# Altium PCB PCB1.PcbDoc
Units mm, origin at the board's own origin, x right, y up, seen from the top; angles counter-clockwise.
Board outline 27.94 x 25.4 mm, 2 copper layers (Top Layer, Bottom Layer); 2 components, 24 nets, 34 pads, 4 vias.
Unrouted connection lines stored in the file: 4.
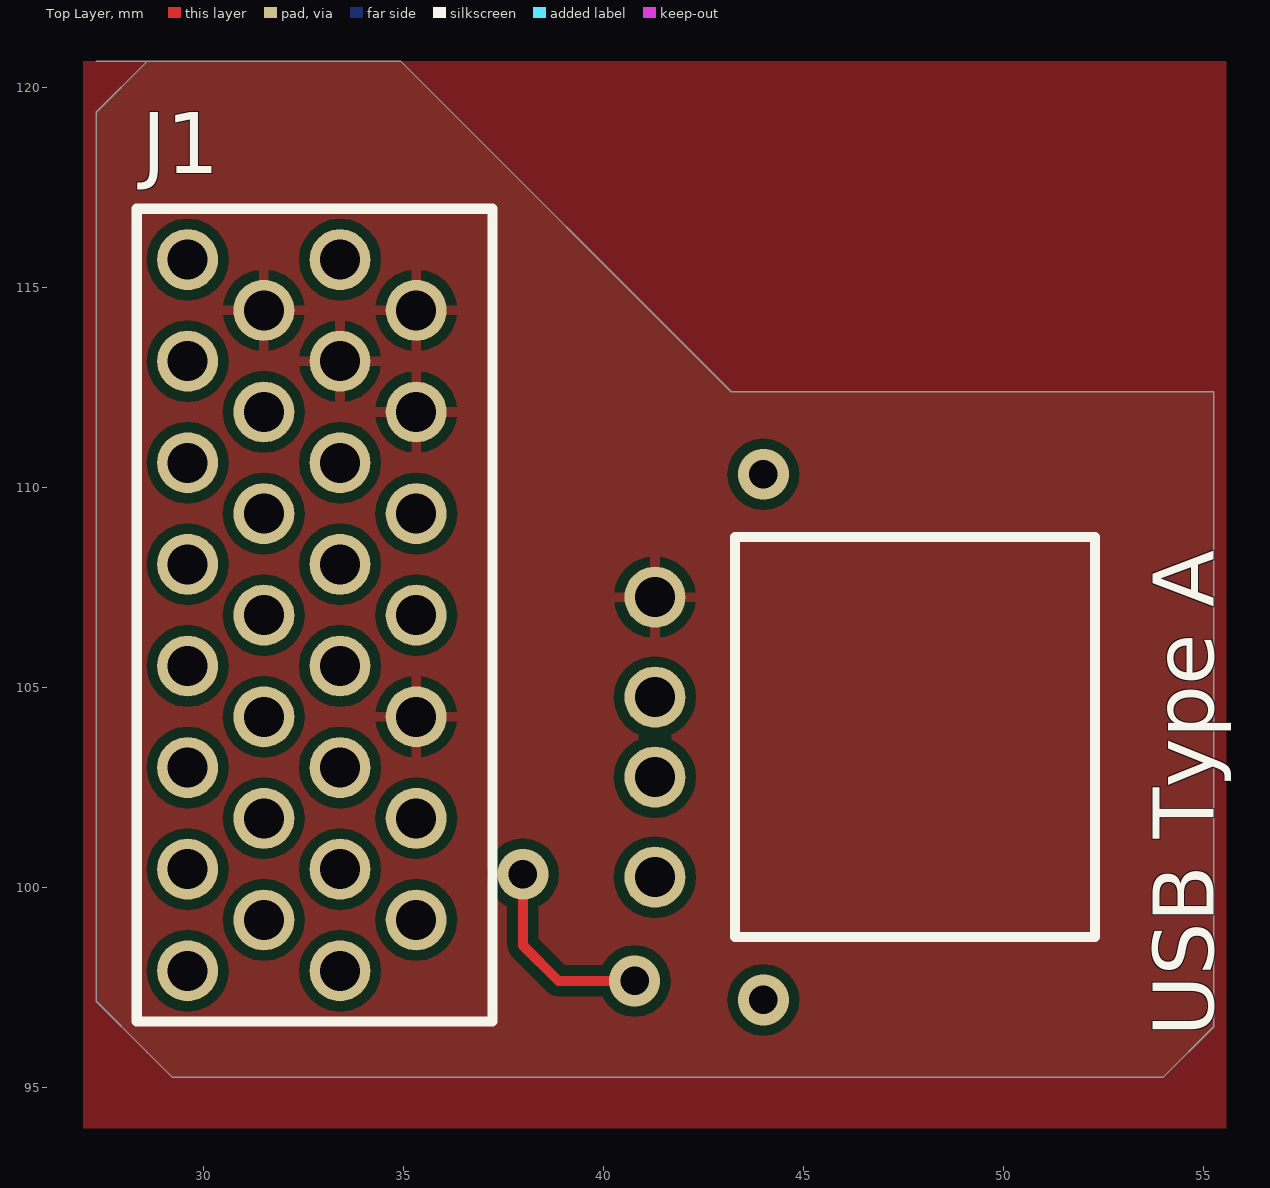
[diagram p0: Top Layer view]
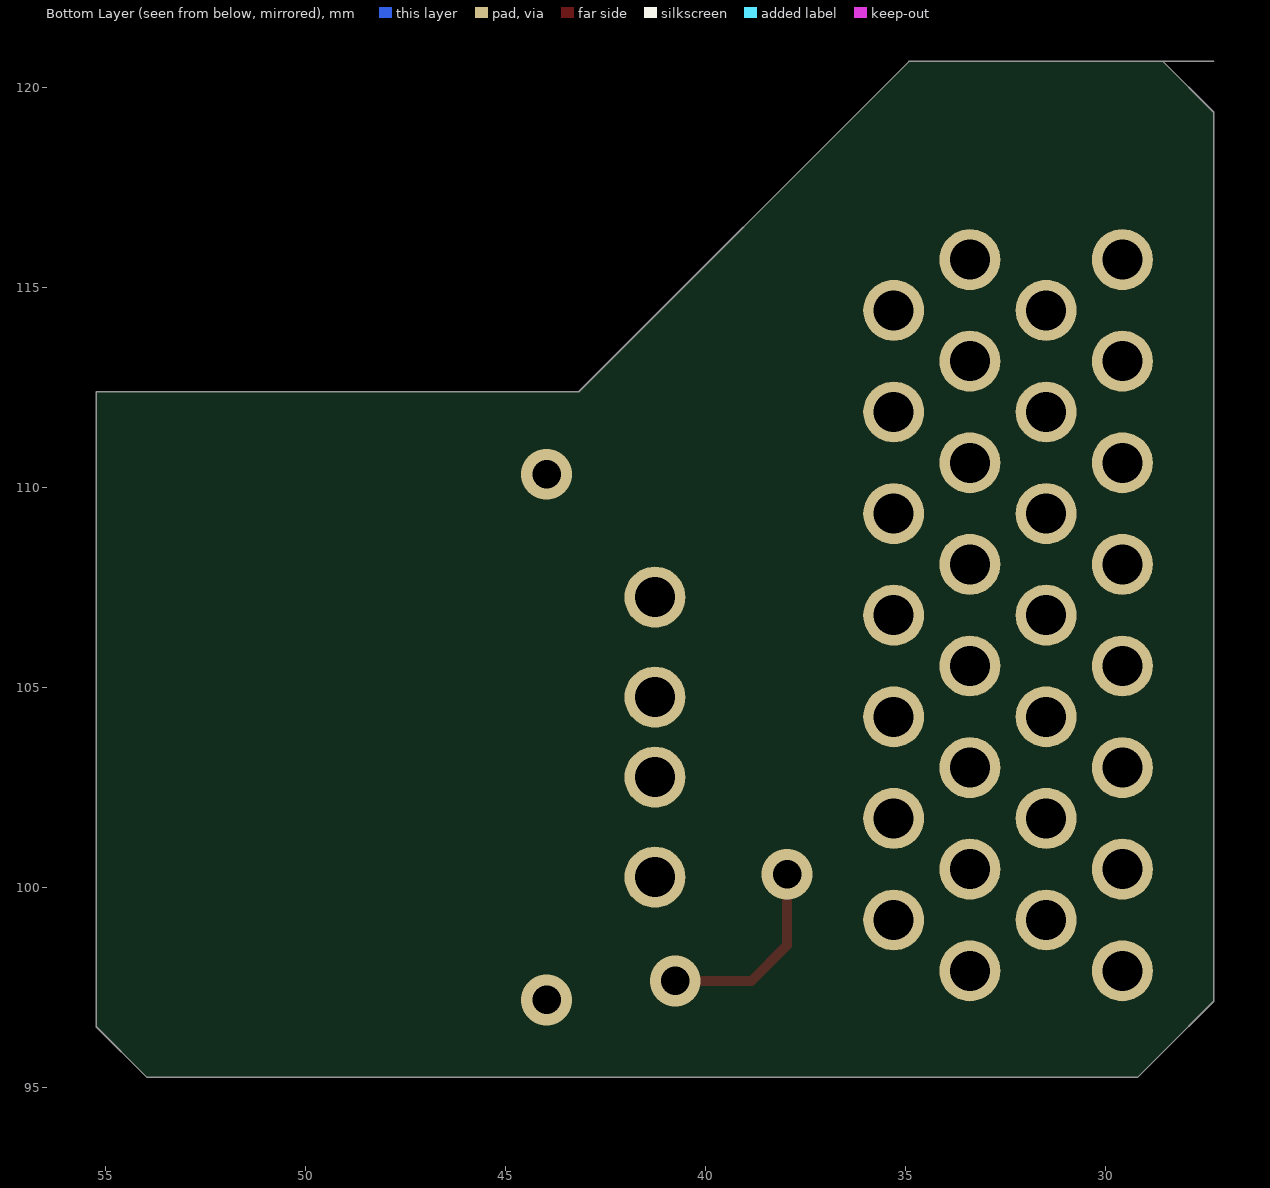
[diagram p1: Bottom Layer view, seen from below]

## Layer stack, top to bottom
Top Solder: solder mask 0.0102, Solder Resist, Dk 3.5
Top Layer: signal copper 0.0356
Dielectric 1: dielectric 0.32, FR-4, Dk 4.8
Bottom Layer: signal copper 0.0356
Bottom Solder: solder mask 0.0102, Solder Resist, Dk 3.5

## Board outline
29.21,120.65 28.575,120.65 27.305,119.38 27.305,97.155 28.575,95.885 29.21,95.25 53.975,95.25 55.245,96.52 55.245,112.395 43.18,112.395 34.925,120.65 27.305,120.65

## Design rules (kind name [scope] priority, off if disabled: settings)
Clearance [All] p1: gap=0.254
PolygonConnect [All] p1: connectstyle=Relief reliefconductorwidth=0.254 reliefentries=4 polygonreliefangle="90 Angle" airgapwidth=0.254
RoutingVias [All] p1: holewidth=0.711 width=1.27 viastyle="Through Hole" minholewidth=0.711 minwidth=1.27 maxholewidth=0.711 maxwidth=1.27
SolderMaskExpansion [All] p1: expansion=0.102
Width [All] p1: maxlimit=0.254 minlimit=0.254 preferedwidth=0.254
30 further rules are at their usual default settings.

## Components (designator, comment, footprint, x,y, rotation, side; value= is the part's Value field where it differs from the comment)
J1 "JAE_TX24" TX_24 29.591,97.917 r0 top
"USB Type A" "USB" "USB 2.0 Type A Female" 41.275,103.759 r90 top

## Footprints (in the part's own frame and the unit in brackets; to place one, negate y for a bottom-side part, rotate by r counter-clockwise, add the part's x,y. Pads: shape width x height; smd on the part's side, far side on the other; paste and mask are expansions set on the pad)
TX_24 [mil]
  round 60 hole 39.37: 1(0,0) 2(75,50) 3(0,100) 4(75,150) 5(0,200) 6(75,250) 7(0,300) 8(75,350) 9(0,400) 10(75,450) 11(0,500) 12(75,550) 13(0,600) 14(75,650) 15(0,700) 16(150,0) 17(225,50) 18(150,100) 19(225,150) 20(150,200) 21(225,250) 22(150,300) 23(225,350) 24(150,400) 25(225,450) 26(150,500) 27(225,550) 28(150,600) 29(225,650) 30(150,700)
  silkscreen extent -50,-50 300,750
"USB 2.0 Type A Female" [mm]
  round 1.524 hole 1: 1(-3.5,0) 2(-1,0) 3(1,0) 4(3.5,0)
  silkscreen extent -5,-11 5,-2

## Part data
"USB Type A": library part Component_1

## Via types
v1: diameter 1.27, hole 0.711, Top Layer to Bottom Layer, 4 vias

## Nets (pads, with @x,y where several pads share a name; then routed paths per layer and width w, separated by ;. In a path a pad name is that pad's centre, name@x,y a point inside that pad or via, vN(x,y) a via of type N, cw(c..) or ccw(c..) an arc to the next point about the centre after c; other vN are vias at no path point)
+5V: J1.19
+5V_USB: "USB Type A.1" J1.17 | length 5.4
  Top Layer w0.254: v1(37.973,100.33) 37.973,98.552 38.862,97.663 v1(40.767,97.663)
  Bottom Layer w0.254: v1@37.973,99.822 v1(37.973,100.33)
"BUS ID": J1.23
CANH1: J1.12
CANL1: J1.13
D_N: "USB Type A.2" J1.1 | length 0
  Bottom Layer w0.254: 41.275,102.743 41.275,102.759
D_P: "USB Type A.3" J1.2
FMU-SWCLK: J1.18
FMU-SWDIO: J1.3
GND: "USB Type A.4" J1.14 J1.21 J1.27 J1.28 J1.29
IO-PWM6: J1.8
IO-PWM7: J1.5
IO-PWM8: J1.6
IO-SWCLK: J1.20
IO-SWDIO: J1.4
"IO-USART1 RX": J1.22
"IO-USART1 TX": J1.7
SER2CT: J1.25
SER2RT: J1.10
SER2RX: J1.11
SER2TX: J1.26
SER5RX: J1.9
SER5TX: J1.24
UGND: J1.16
pads on no net: J1.15 J1.30
copper on no net:
  other v1: 43.985,97.189 43.985,110.329

## Polygon pours and split planes (outlines as drawn)
GND on Top Layer "gnd plane" (solid, pour order 2): 26.987,120.65 26.987,93.98 55.562,93.98 55.562,110.744 55.562,120.65 50.863,120.65